# Altium PCB 32-帆板.PcbDoc
Units mm, origin at the board's own origin, x right, y up, seen from the top; angles counter-clockwise.
Board outline 257.05 x 185.8 mm, 2 copper layers (Top Layer, Bottom Layer); 51 components, 60 nets, 358 pads, 138 vias.
Unrouted connection lines stored in the file: 8.
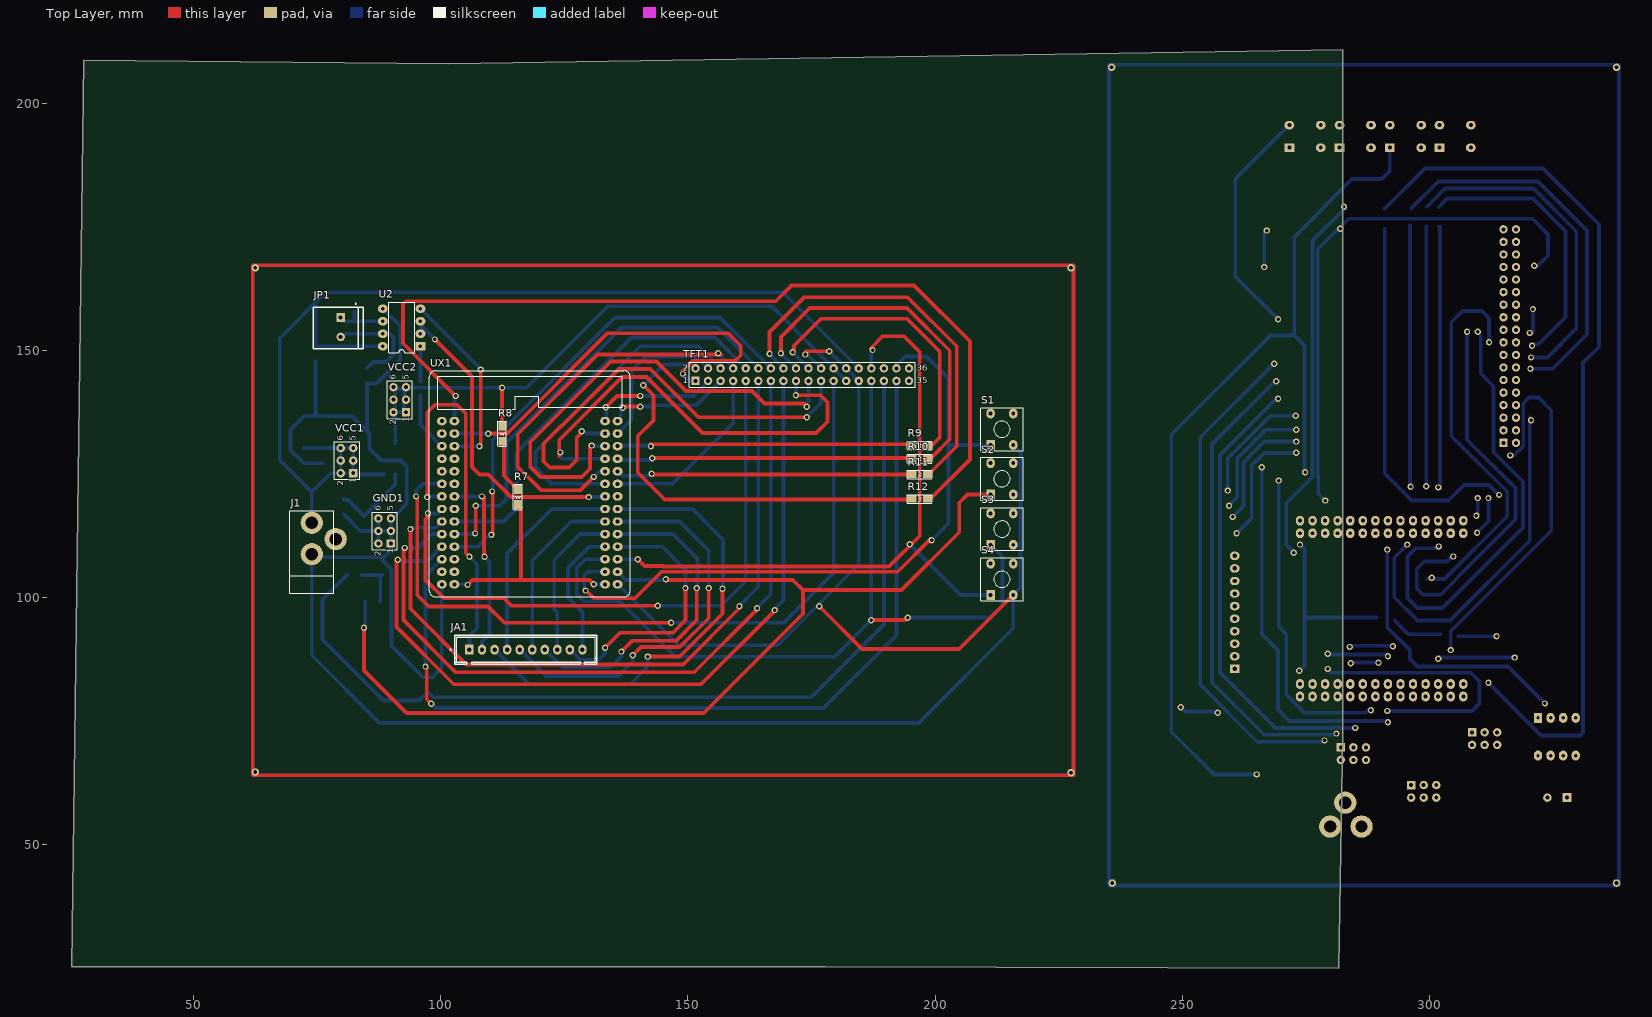
[diagram p0: Top Layer view]
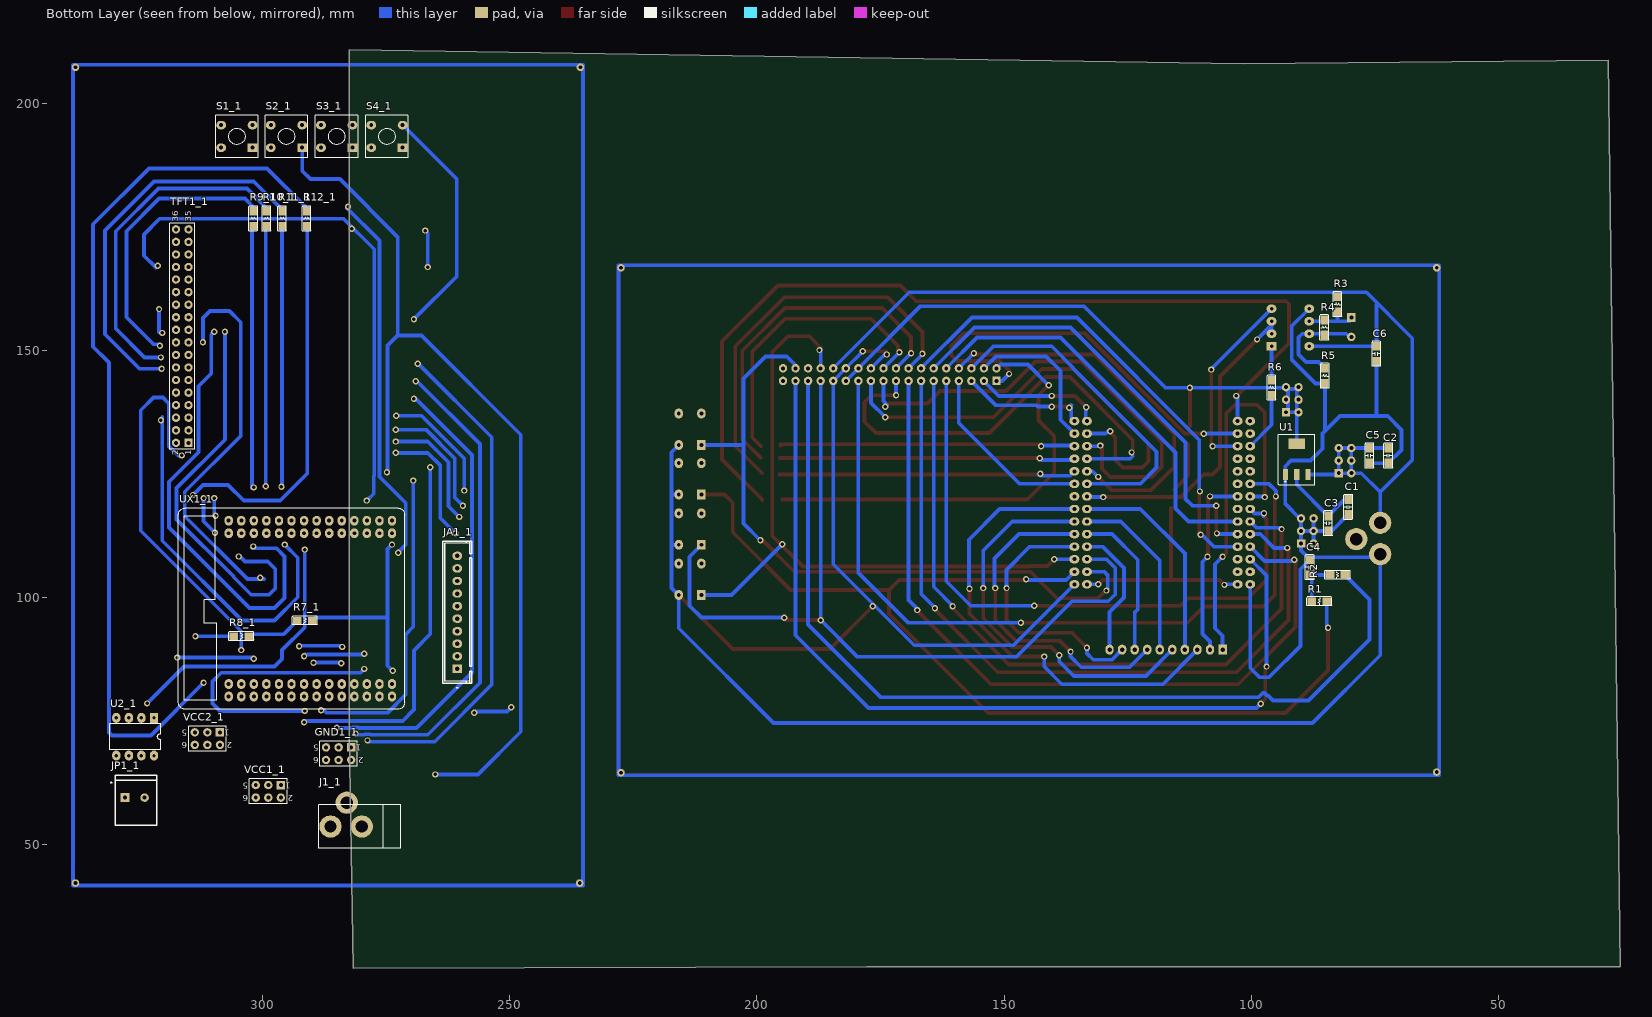
[diagram p1: Bottom Layer view, seen from below]

## Layer stack, top to bottom
Top Layer: signal copper 0.0356
Dielectric: dielectric 0.32, FR-4, Dk 4.8
Bottom Layer: signal copper 0.0356

## Board outline
25.4,25.4 177.8,25.4 281.686,25.019 282.448,72.39 282.448,210.82 101.6,208.026 27.813,208.661

## Design rules (kind name [scope] priority, off if disabled: settings)
Clearance [All] p1: gap=0.254
PolygonConnect [All] p1: connectstyle=Relief reliefconductorwidth=0.254 reliefentries=4 polygonreliefangle="90 Angle"
RoutingVias [All] p1: holewidth=0.711 width=1.27 viastyle="Through Hole" minholewidth=0.711 minwidth=1.27 maxholewidth=0.711 maxwidth=1.27
SilkToSilkClearance [All] p1 off: silktosilkclearance=0.254
SilkscreenOverComponentPads SilkToSolderMaskClearance [IsPad] p1 off: minsilkscreentomaskgap=0.254
SolderMaskExpansion [All] p1 off: expansion=0.102
TestPointUsage FabricationTestPointUsage [All] p1: valid=0 allowmultiple=FALSE
Testpoint FabricationTestpoint [All] p1: side=3 testpointundercomponent=TRUE minsize=1.016 maxsize=2.54 preferedsize=1.524 minholesize=0 maxholesize=1.016 preferedholesize=0.813 testpointgrid=0.025 style=297 order=0-112345678
Width [All] p1: maxlimit=2.032 minlimit=0.25 preferedwidth=1.27
22 further rules are at their usual default settings.

## Classes and differential pairs
component class 帆摆: C1 C2 C3 C4 C5 GND1 J1 JA1 JP1 R1 R2 R3 R4 R5 S1 S2 S3 S4 TFT1 U2 UX1 VCC1 VCC2

## Components (designator, comment, footprint, x,y, rotation, side; value= is the part's Value field where it differs from the comment)
C1 "CAP" CC1005-0402 80.433,116.798 r90 bottom
C2 "CAP" CC1005-0402 72.305,127.212 r90 bottom
C3 "CAP" CC1005-0402 84.497,116.544 r270 bottom
C4 "CAP" CC1005-0402 88.18,104.606 r90 bottom
C5 "CAP" CC1005-0402 76.115,127.212 r90 bottom
C6 "CAP" CC1005-0402 74.718,147.786 r90 bottom
GND1 "Header 2X3" HDR2-3 89.958,110.956 r90 top
GND1_1 "Header 2X3" HDR2-3 282.067,69.723 r0 bottom (schematic designator GND1)
J1 "Powerjack_F" PWJ-2/3 73.956,115.147 r90 top
J1_1 "Powerjack_F" PWJ-2/3 286.258,53.721 r0 bottom (schematic designator J1)
JA1 "HEAD10" HEAD10M 105.833,89.493 r90 top
JA1_1 "HEAD10" HEAD10M 260.604,85.598 r0 bottom (schematic designator JA1)
JP1 "H-2" H-2/2-T 79.798,156.676 r0 top
JP1_1 "H-2" H-2/2-T 327.787,59.563 r90 bottom (schematic designator JP1)
R1 "Res" R2012-0805 84.751,99.272 r0 bottom
R2 "Res" R2012-0805 84.116,104.606 r180 bottom
R3 "Res" R2012-0805 82.592,157.819 r90 bottom
R4 "Res" R2012-0805 85.259,153.12 r90 bottom
R5 "Res" R2012-0805 85.132,143.341 r90 bottom
R6 "Res" R2012-0805 95.927,140.928 r90 bottom (schematic designator R5)
R7 "Res" R2012-0805 115.612,121.878 r270 top (schematic designator R3)
R7_1 "Res" R2012-0805 292.989,95.377 r180 bottom (schematic designator R3)
R8 "Res" R2012-0805 112.437,134.705 r270 top (schematic designator R3)
R8_1 "Res" R2012-0805 305.816,92.202 r180 bottom (schematic designator R3)
R9 "Res" R2012-0805 195.368,130.768 r0 top (schematic designator R3)
R9_1 "Res" R2012-0805 301.879,175.133 r90 bottom (schematic designator R3)
R10 "Res" R2012-0805 195.368,128.101 r0 top (schematic designator R3)
R10_1 "Res" R2012-0805 299.212,175.133 r90 bottom (schematic designator R3)
R11 "Res" R2012-0805 195.368,124.926 r0 top (schematic designator R3)
R11_1 "Res" R2012-0805 296.037,175.133 r90 bottom (schematic designator R3)
R12 "Res" R2012-0805 195.368,119.973 r0 top (schematic designator R3)
R12_1 "Res" R2012-0805 291.084,175.133 r90 bottom (schematic designator R3)
S1 "SW-PB" SW-PB-4S 213.529,134.07 r90 top
S1_1 "SW-PB" SW-PB-4S 305.181,193.294 r0 bottom (schematic designator S1)
S2 "SW-PB" SW-PB-4S 213.529,124.037 r90 top
S2_1 "SW-PB" SW-PB-4S 295.148,193.294 r0 bottom (schematic designator S2)
S3 "SW-PB" SW-PB-4S 213.529,113.877 r90 top
S3_1 "SW-PB" SW-PB-4S 284.988,193.294 r0 bottom (schematic designator S3)
S4 "SW-PB" SW-PB-4S 213.529,103.717 r90 top
S4_1 "SW-PB" SW-PB-4S 274.828,193.294 r0 bottom (schematic designator S4)
TFT1 "Header 2X18" HDR2-18 151.553,143.849 r0 top
TFT1_1 "Header 2X18" HDR2-18 314.96,131.318 r90 bottom (schematic designator TFT1)
U1 "LM1117" DSO-G3/P2.3 93.133,124.926 r180 bottom
U2 "MAX485CPA" DIP8 92.117,154.644 r90 top
U2_1 "MAX485CPA" DIP8 325.755,71.882 r0 bottom (schematic designator U2)
UX1 "STM32MINI" STM32---MIN---64 100.245,135.721 r0 top
UX1_1 "STM32MINI" STM32---MIN---64 306.832,80.01 r90 bottom (schematic designator UX1)
VCC1 "Header 2X3" HDR2-3 82.338,125.18 r90 top
VCC1_1 "Header 2X3" HDR2-3 296.291,62.103 r0 bottom (schematic designator VCC1)
VCC2 "Header 2X3" HDR2-3 93.006,137.499 r90 top
VCC2_1 "Header 2X3" HDR2-3 308.61,72.771 r0 bottom (schematic designator VCC2)

## Footprints (in the part's own frame and the unit in brackets; to place one, negate y for a bottom-side part, rotate by r counter-clockwise, add the part's x,y. Pads: shape width x height; smd on the part's side, far side on the other; paste and mask are expansions set on the pad)
CC1005-0402 [mil]
  rect 70x60 smd: 1(0,0) 2(120,0)
  silkscreen extent -40,-35 160,35
DIP8 [mm]
  rect 1.7x2 hole 0.7: 1(-3.81,-3.81)
  oval 1.7x2 hole 0.7: 2(-1.27,-3.81) 3(1.27,-3.81) 4(3.81,-3.81) 5(3.81,3.81) 6(1.27,3.81) 7(-1.27,3.81) 8(-3.81,3.81)
  silkscreen extent -5.15,-2.65 5.15,2.65
DSO-G3/P2.3 [mil]
  rect 41.34x85 smd: 1(181.1,0) 2(0,0) 3(90.55,0)
  rect 133.86x85 smd: 3(90,245)
  silkscreen extent -55,-85 235,315
H-2/2-T [mm]
  rect 1.8x1.8 hole 0.8: 1(0,0)
  round 1.7 hole 0.8: 2(0,-3.937)
  silkscreen extent -5.59,-6.35 4.57,2.92
HDR2-3 [mm]
  rect 1.7x1.7 hole 0.8: 1(0,0)
  round 1.7 hole 0.8: 2(0,2.54) 3(2.54,0) 4(2.54,2.54) 5(5.08,0) 6(5.08,2.54)
  silkscreen extent -1.27,-1.27 6.35,3.81
HDR2-18 [mm]
  rect 1.7x1.7 hole 0.8: 1(0,0)
  round 1.7 hole 0.8: 2(0,2.54) 3(2.54,0) 4(2.54,2.54) 5(5.08,0) 6(5.08,2.54) 7(7.62,0) 8(7.62,2.54) 9(10.16,0) 10(10.16,2.54) 11(12.7,0) 12(12.7,2.54) 13(15.24,0) 14(15.24,2.54) 15(17.78,0) 16(17.78,2.54) 17(20.32,0) 18(20.32,2.54) 19(22.86,0) 20(22.86,2.54) 21(25.4,0) 22(25.4,2.54) 23(27.94,0) 24(27.94,2.54) 25(30.48,0) 26(30.48,2.54) 27(33.02,0) 28(33.02,2.54) 29(35.56,0) 30(35.56,2.54) 31(38.1,0) 32(38.1,2.54) 33(40.64,0) 34(40.64,2.54) 35(43.18,0) 36(43.18,2.54)
  silkscreen extent -1.27,-1.27 44.45,3.81
HEAD10M [mm]
  rect 2x1.7 hole 0.9: 1(0,0)
  oval 2x1.7 hole 0.9: 2(0,-2.54) 3(0,-5.08) 4(0,-7.62) 5(0,-10.16) 6(0,-12.7) 7(0,-15.24) 8(0,-17.78) 9(0,-20.32) 10(0,-22.86)
  silkscreen extent -2.92,-25.78 2.92,3.93
PWJ-2/3 [mm]
  round 4.5 hole 2.5: 1(-6.35,0) 2(0,0) 3(-3.302,-4.826)
  silkscreen extent -14.22,-4.45 2.41,4.44
R2012-0805 [mil]
  rect 70x60 smd: 1(0,0) 2(120,0)
  silkscreen extent -40,-35 160,35
STM32---MIN---64 [mm]
  oval 2x1.7 hole 0.8: 1(0,0) 2(0,-2.54) 3(0,-5.08) 4(0,-7.62) 5(0,-10.16) 6(0,-12.7) 7(0,-15.24) 8(0,-17.78) 9(0,-20.32) 10(0,-22.86) 11(0,-25.4) 12(0,-27.94) 13(0,-30.48) 14(0,-33.02) 15(2.54,0) 16(2.54,-2.54) 17(2.54,-5.08) 18(2.54,-7.62) 19(2.54,-10.16) 20(2.54,-12.7) 21(2.54,-15.24) 22(2.54,-17.78) 23(2.54,-20.32) 24(2.54,-22.86) 25(2.54,-25.4) 26(2.54,-27.94) 27(2.54,-30.48) 28(2.54,-33.02) 29(33.02,0) 30(33.02,-2.54) 31(33.02,-5.08) 32(33.02,-7.62) 33(33.02,-10.16) 34(33.02,-12.7) 35(33.02,-15.24) 36(33.02,-17.78) 37(33.02,-20.32) 38(33.02,-22.86) 39(33.02,-25.4) 40(33.02,-27.94) 41(33.02,-30.48) 42(33.02,-33.02) 43(35.56,0) 44(35.56,-2.54) 45(35.56,-5.08) 46(35.56,-7.62) 47(35.56,-10.16) 48(35.56,-12.7) 49(35.56,-15.24) 50(35.56,-17.78) 51(35.56,-20.32) 52(35.56,-22.86) 53(35.56,-25.4) 54(35.56,-27.94) 55(35.56,-30.48) 56(35.56,-33.02)
  silkscreen extent -2.54,-35.56 38.1,10.16
SW-PB-4S [mm]
  rect 2x1.7 hole 0.8: 1(-3.175,2.286)
  oval 2x1.7 hole 0.8: 2(-3.175,-2.286) 3(3.175,-2.286) 4(3.175,2.286)
  silkscreen extent -4.32,-4.32 4.32,4.32

## Part data
C1 C2 C3 C4 C5 C6: "Capacitor"
GND1 GND1_1 VCC1 VCC1_1 VCC2 VCC2_1: "Header, 3-Pin, Dual row"
J1 J1_1: "2-Conductor Jack with 1 break contact"
JA1 JA1_1: "Connector,10-pin"
JP1 JP1_1: "Header, 2-Pin"
R1 R2 R3 R4 R5 R6 R7 R7_1 R8 R8_1 R9 R9_1 R10 R10_1 R11 R11_1 R12 R12_1: "Resistor"
S1 S1_1 S2 S2_1 S3 S3_1 S4 S4_1: "Switch"
TFT1 TFT1_1: "Header, 18Pin, Dual row"
U2 U2_1: library part NRF24L01
UX1 UX1_1: library part STM32---MIN--64

## Free pads (board coordinates)
  round 1.524 hole 0.762: 0(227.499,64.601) 0(235.712,207.264) 1(227.499,166.709) 1(337.82,207.264) 2(62.526,166.709) 2(337.82,42.291) 3(62.526,64.728) 3(235.839,42.291)

## Via types
v1: diameter 1.27, hole 0.711, Top Layer to Bottom Layer, 138 vias

## Nets (pads, with @x,y where several pads share a name; then routed paths per layer and width w, separated by ;. In a path a pad name is that pad's centre, name@x,y a point inside that pad or via, vN(x,y) a via of type N, cw(c..) or ccw(c..) an arc to the next point about the centre after c; other vN are vias at no path point)
A: JP1.1 R3.1 R4.2 U2.6 | length 10.3
  Bottom Layer w0.762: JP1.1@79.798,156.295 80.179,155.914 U2.6 ; 82.592,156.168 R3.1
A0: JA1.10 UX1.39 | length 27
  Bottom Layer w0.762: JA1.10 128.693,97.113 125.772,100.034 125.772,106.003 130.09,110.321 UX1.39
A1: JA1.9 UX1.53 | length 53.8
  Top Layer w0.762: v1(133.265,89.874) 136.313,92.922 146.981,92.922 149.521,95.462 v1(149.521,101.939)
  Bottom Layer w0.762: JA1.9 128.185,87.461 131.995,87.461 133.265,88.731 v1(133.265,89.874) ; UX1.53 144.822,110.321 149.521,105.622 v1@149.521,102.193
A2: JA1.8 UX1.38 | length 30.9
  Bottom Layer w0.762: JA1.8 123.613,96.986 122.978,97.621 122.978,107.654 128.185,112.861 UX1.38
A3: JA1.7 UX1.52 | length 67.1
  Top Layer w0.762: v1(136.567,89.112) 138.726,91.271 147.616,91.271 151.807,95.462 v1(151.807,101.939)
  Bottom Layer w0.762: JA1.7 124.629,85.937 134.408,85.937 136.567,88.096 v1(136.567,89.112) ; UX1.52 146.981,112.861 151.934,107.908 v1@151.934,102.193
A4: JA1.6 UX1.37 | length 36.7
  Bottom Layer w0.762: JA1.6 118.533,107.527 126.407,115.401 UX1.37 UX1.37@132.63,115.401
A5: JA1.5 UX1.51 | length 80.3
  Top Layer w0.762: v1(138.853,88.35) 140.504,90.001 148.378,90.001 154.22,95.843 v1(154.22,101.939)
  Bottom Layer w0.762: JA1.5 121.327,84.159 135.932,84.159 138.853,87.08 v1@138.853,88.096 ; UX1.51 148.378,115.401 154.22,109.559 v1(154.22,101.939)
A6: JA1.4 UX1.36 | length 43
  Bottom Layer w0.762: JA1.4 113.453,108.924 122.47,117.941 UX1.36
A7: JA1.3 UX1.50 | length 94.7
  Top Layer w0.762: v1(141.901,88.096) 148.378,88.096 157.014,96.732 v1(157.014,101.812)
  Bottom Layer w0.762: JA1.3 117.898,82.508 138.345,82.508 141.901,86.064 v1(141.901,88.096) ; UX1.50 150.918,117.941 157.141,111.718 v1@157.141,102.066
A8: UX1.2
A9: U2.4 UX1.17 | length 37.7
  Top Layer w0.762: v1@108.119,130.895 v1(108.119,146.135)
  Bottom Layer w0.762: U2.4 108.119,146.262 v1(108.119,146.135) ; UX1.17 v1(107.865,130.641)
A10: R6.1 R6.2 U2.1 UX1.3 | length 19.1
  Bottom Layer w0.762: R6.1 95.927,134.959 UX1.3 ; R6.2@95.927,143.849 U2.1
A11: UX1.18
A12: UX1.4
A13: UX1.19
A14: UX1.5
A15: UX1.20
B: JP1.2 R4.1 R5.2 U2.7 | length 21.3
  Bottom Layer w0.762: JP1.2@79.798,152.358 80.814,153.374 U2.7 89.704,153.374 90.466,152.612 90.466,149.183 88.942,147.659 86.402,147.659 R5.2
B0: TFT1.6 UX1.34 | length 66.9
  Bottom Layer w0.762: UX1.34 122.47,123.021 119.168,126.323 119.168,129.498 136.186,146.516 136.122,146.58 140.377,150.834 152.188,150.834 TFT1.6
B1: TFT1.7 UX1.48 | length 37
  Bottom Layer w0.762: UX1.48 146.854,123.021 159.173,135.34 TFT1.7
B2: TFT1.8 UX1.33 | length 80.6
  Top Layer w0.762: v1(130.979,124.418) 128.312,121.751 120.311,121.751 115.612,126.45 115.612,133.054 131.741,149.183 156.76,149.183 v1(156.125,149.437)
  Bottom Layer w0.762: v1(130.979,124.418) 132.122,125.561 UX1.33 ; v1(156.125,149.437) TFT1.8
B3: TFT1.9 UX1.8 | length 126.4
  Top Layer w0.762: v1@97.578,116.544 96.943,115.909 96.943,103.59 100.626,99.907 112.818,99.907 114.342,98.383 v1(143.933,98.383)
  Bottom Layer w0.762: v1@97.578,116.544 v1(97.451,117.052) 99.356,117.052 UX1.8 ; v1(143.933,98.383) 156.76,98.383 161.713,103.336 TFT1.9
B4: TFT1.10 UX1.23 | length 83.5
  Bottom Layer w0.762: UX1.23 112.691,115.401 115.358,118.068 115.358,129.371 138.599,152.612 155.49,152.612 TFT1.10
B5: TFT1.11 UX1.9 | length 147
  Top Layer w0.762: v1@94.276,113.877 93.895,113.496 93.895,110.72 94.022,110.593 94.022,109.541 93.895,109.414 93.895,97.748 105.134,86.509 149.076,86.509 160.316,97.748 v1@160.189,98.129
  Bottom Layer w0.762: v1@94.276,113.877 94.022,114.131 98.975,114.131 UX1.9 ; v1@160.189,98.129 164.253,102.193 TFT1.11
  other v1: 160.443,98.256 93.895,113.877
B6: TFT1.12 UX1.24 | length 91.2
  Top Layer w0.762: v1@107.103,113.242 v1(107.103,118.576)
  Bottom Layer w0.762: UX1.24 v1@106.404,112.861 ; v1(107.103,118.576) 111.929,118.576 113.326,119.973 113.326,131.403 136.567,154.644 155.998,154.644 TFT1.12
  other v1: 106.976,112.988
B7: TFT1.13 UX1.10 | length 151.7
  Top Layer w0.762: v1(92.752,110.067) 92.498,109.813 92.498,108.307 92.625,108.18 92.625,107.128 92.498,107.001 92.498,95.462 103.039,84.921 151.299,84.921 v1@163.999,97.621
  Bottom Layer w0.762: v1(92.752,110.067) 95.419,110.067 98.213,112.861 UX1.10 ; v1@163.935,97.939 166.793,100.796 TFT1.13
  other v1: 163.999,97.875
B8: TFT1.14 UX1.25 | length 98.1
  Top Layer w0.762: v1@110.532,112.861 v1@110.532,121.243
  Bottom Layer w0.762: UX1.25 107.611,110.321 110.151,112.861 v1@110.532,112.861 ; v1@110.532,121.751 110.532,131.911 135.297,156.676 156.506,156.676 TFT1.14
  other v1: 110.278,112.734 110.405,121.497
B9: TFT1.15 UX1.11 | length 159
  Top Layer w0.762: v1(91.355,107.654) 91.101,107.4 91.101,94.065 102.658,82.508 152.696,82.508 167.301,97.113 v1@167.301,97.494
  Bottom Layer w0.762: v1(91.355,107.654) 91.101,107.4 97.324,107.4 UX1.11 ; v1@167.301,97.494 169.333,99.526 TFT1.15
  other v1: 167.555,97.494
B10: R11.1 R11.2 TFT1.16 UX1.47 | length 141.4
  Top Layer w0.762: v1@143.044,124.926 R11.1@195.495,124.926 ; v1@166.666,149.056 v1(166.539,149.31) 166.539,153.755 173.524,160.74 194.479,160.74 204.385,150.834 204.385,130.641 R11.2@198.924,125.18
  Bottom Layer w0.762: UX1.47 136.694,124.672 142.663,124.672 v1@143.044,124.926 ; v1@166.666,149.056 TFT1.16
  other v1: 142.663,125.053
B11: TFT1.17 UX1.32 | length 91.7
  Top Layer w0.762: 123.994,128.609 123.994,131.911 136.694,144.611 141.647,144.611 152.95,133.308 164.362,133.308 175.937,133.308 178.223,135.594 178.223,139.531 176.826,140.928 v1(171.873,140.928)
  Bottom Layer w0.762: 123.994,128.609 124.502,128.101 UX1.32 ; v1(171.873,140.928) TFT1.17
  other v1: 124.248,129.371
B12: R10.1 R10.2 TFT1.18 UX1.46 | length 130.4
  Top Layer w0.762: v1(142.79,128.228) R10.1@195.368,128.228 ; v1(168.825,149.437) 168.825,152.739 174.667,158.581 194.352,158.581 202.988,149.945 202.988,132.038 199.305,128.355
  Bottom Layer w0.762: UX1.46@136.059,127.847 142.409,127.847 v1(142.79,128.228) ; v1(168.825,149.437) TFT1.18
B13: TFT1.19 UX1.31 | length 97.8
  Top Layer w0.762: v1@130.217,130.895 130.217,126.069 128.566,124.418 120.184,124.418 118.152,126.45 118.152,131.53 134.408,147.786 143.679,147.786 149.648,141.817 162.983,141.817 165.523,139.277 173.27,139.277 173.651,139.15 v1@173.651,139.023
  Bottom Layer w0.762: v1@130.217,130.895 130.471,131.022 130.852,130.641 UX1.31 ; v1@173.651,139.023 174.413,139.785 TFT1.19
  other v1: 130.598,130.768 174.032,138.642
B14: R9.1 R9.2 TFT1.20 UX1.45 | length 120.2
  Top Layer w0.762: v1@142.409,131.022 R9.1@194.987,131.022 ; v1(171.174,149.628) 171.492,149.818 171.492,150.961 176.953,156.422 194.352,156.422 200.956,149.818 200.956,132.419 R9.2@199.178,130.641 ; R9.1@195.241,130.768 R9.1@195.241,131.022
  Bottom Layer w0.762: UX1.45@135.932,130.768 142.536,130.768 v1@142.409,131.022 ; v1(171.174,149.628) TFT1.20
  other v1: 142.536,130.641
B15: TFT1.21 UX1.30 | length 95
  Top Layer w0.762: v1@128.693,133.562 127.55,132.419 127.55,127.847 126.026,126.323 122.089,126.323 120.819,127.593 120.819,131.149 124.375,134.705 124.502,134.705 136.059,146.262 142.409,146.262 152.188,136.483 v1(174.032,136.483)
  Bottom Layer w0.762: v1@128.693,133.562 128.693,133.943 129.455,133.181 UX1.30 ; v1(174.032,136.483) 176.953,139.404 TFT1.21
  other v1: 128.566,133.689
BAT: UX1.26
BL: TFT1.23 UX1.6 | length 156.3
  Top Layer w0.762: v1@95.292,120.1 95.292,100.542 97.59,98.244 109.577,98.244 112.867,94.954 v1(146.6,94.954)
  Bottom Layer w0.762: v1@95.038,120.227 95.038,121.624 96.435,123.021 UX1.6 ; v1(146.6,94.954) 169.46,94.954 179.493,104.987 TFT1.23
  other v1: 95.038,120.481
BT: UX1.1
C0: S1.1 TFT1.34 UX1.41 | length 138.5
  Top Layer w0.762: v1@129.582,101.304 130.979,99.907 139.361,99.907 144.695,105.241 192.447,105.241 v1@199.051,111.845
  Bottom Layer w0.762: v1@129.074,101.812 129.074,104.606 129.709,105.241 UX1.41 ; TFT1.34 192.193,147.024 193.971,148.802 198.289,148.802 202.734,144.357 202.734,130.895 ; v1@199.435,111.721 202.734,115.02 202.734,130.895 ; S1.1 202.734,130.895
  other v1: 129.328,101.431 199.305,111.591
C1: R1.1 S2.1 UX1.55 | length 208.3
  Top Layer w0.762: v1(84.497,93.938) 84.497,85.302 93.133,76.666 153.204,76.666 173.27,96.732 173.27,101.558 ; v1@145.33,103.59 171.238,103.59 173.27,101.558 ; S2.1 206.544,120.862 204.893,119.211 204.893,113.242 193.209,101.558 173.27,101.558
  Bottom Layer w0.762: v1@84.751,93.684 R1.1 ; UX1.55 137.456,103.59 v1@145.457,103.59
  other v1: 145.584,103.717
C2: S3.1 TFT1.29 UX1.40 | length 168.6
  Top Layer w0.762: v1(187.113,95.462) 193.971,95.462 v1(194.479,95.97)
  Bottom Layer w0.762: 127.55,100.669 127.55,106.003 129.328,107.781 UX1.40 ; 127.931,100.288 128.947,99.272 136.313,99.272 147.552,88.033 179.683,88.033 v1(187.113,95.462) TFT1.29 ; v1(194.479,95.97) 211.243,95.97 213.656,98.383 213.656,108.289 S3.1
C3: S4.1 TFT1.30 UX1.54 | length 138.5
  Top Layer w0.762: v1(139.869,107.781) 141.266,106.384 144.868,106.384 144.956,106.296 190.708,106.296 196.892,112.48 196.892,149.691 193.717,152.866 189.399,152.866 186.986,150.453 v1@187.113,150.326
  Bottom Layer w0.762: UX1.54 v1(139.869,107.781) ; TFT1.30 v1@187.113,150.326 ; v1(194.86,110.829) 205.147,100.542 S4.1
  other v1: 187.367,150.072
C4: U2.2 U2.3 UX1.35 | length 64.7
  Top Layer w0.762: v1(98.848,152.231) 106.341,144.738 106.341,126.45 107.865,124.926 109.643,124.926 114.215,120.354 v1(129.963,120.354)
  Bottom Layer w0.762: U2.2 95.927,154.644 ; U2.3 95.927,154.644 ; v1(98.848,152.231) 96.435,154.644 95.927,154.644 ; v1(129.963,120.354) UX1.35@133.138,120.354
C5: UX1.49
C6: TFT1.4 UX1.44 | length 31.6
  Bottom Layer w0.762: UX1.44 138.599,135.975 138.599,145.881 141.52,148.802 151.68,148.802 TFT1.4
C7: TFT1.3 UX1.29 | length 25.3
  Top Layer w0.762: v1@133.646,138.769 135.678,140.801 v1(140.377,140.801)
  Bottom Layer w0.762: UX1.29 133.519,135.975 133.519,138.515 v1@133.646,138.769 ; v1@140.885,140.801 151.103,140.801 154.093,143.791 TFT1.3
  other v1: 133.392,138.515
C8: R12.1 R12.2 TFT1.2 UX1.15 | length 274
  Top Layer w0.762: v1(103.039,140.801) 92.371,151.469 92.371,159.343 92.967,159.939 167.77,159.939 170.984,163.153 195.749,163.153 207.052,151.85 207.052,127.974 198.924,119.846 R12.2@198.924,119.719 ; v1(141.012,142.96) 143.044,140.928 143.044,135.848 139.869,132.673 139.869,125.307 145.33,119.846 R12.1@194.86,119.846
  Bottom Layer w0.762: UX1.15 v1@102.785,140.674 ; v1(141.012,142.96) 145.203,147.151 150.791,147.151 TFT1.2
C9: TFT1.1 UX1.16 | length 85.5
  Top Layer w0.762: v1(109.643,133.181) 113.462,133.181 133.782,153.501 158.157,153.501 160.716,150.942 160.716,149.037 159.554,147.874 150.938,147.874 148.945,145.881
  Bottom Layer w0.762: UX1.16 v1(109.643,133.181) ; v1(149.011,145.248) 150.41,143.849 TFT1.1
C11: JA1.2 UX1.21 | length 37.8
  Top Layer w0.762: v1@108.754,108.035 v1@108.754,120.354
  Bottom Layer w0.762: UX1.21 v1(108.373,120.481) ; JA1.2 108.373,91.144 109.897,92.668 109.897,107.273 v1(108.881,108.289)
C12: JA1.1 UX1.7 | length 78.4
  Top Layer w0.762: v1(97.324,120.354) 97.324,137.499 98.848,139.023 103.293,139.023 105.071,137.245 105.071,109.051 v1(105.833,108.289)
  Bottom Layer w0.762: v1@97.451,120.481 UX1.7 ; JA1.1 105.833,92.287 107.357,93.811 107.357,106.765 v1(105.833,108.289)
C13: TFT1.33 UX1.12 | length 182.6
  Top Layer w0.762: v1@97.197,85.81 97.197,79.46 v1(98.086,78.571)
  Bottom Layer w0.762: v1@96.943,86.191 96.943,104.479 UX1.12 ; v1(98.086,78.571) 98.975,77.682 177.461,77.682 192.193,92.414 TFT1.33
  other v1: 96.943,86.064
C14: UX1.27
C15: UX1.13
D2: UX1.22
GND: C1.1 C2.1 C3.2 C4.2 C5.1 C6.1 GND1.1 GND1.2 GND1.3 GND1.4 GND1.5 GND1.6 J1.1 R5.1 S1.2 S2.2 S3.2 S4.2 TFT1.22 TFT1.26 TFT1.27 U1.2 U2.5 UX1.14 UX1.56 | length 563.3
  Top Layer w0.762: v1@173.905,149.437 173.905,149.818 v1(178.604,149.818) ; v1(176.572,98.256) 185.208,89.62 204.893,89.62 S4.2
  Bottom Layer w0.762: C6.1 74.718,136.864 74.591,136.737 ; C5.1 C2.1 69.638,129.879 69.638,133.943 72.432,136.737 74.591,136.737 ; C1.1 83.735,113.496 C3.2 GND1.4 ; GND1.2 GND1.4 ; GND1.6 GND1.4 ; C4.2 90.085,105.749 90.085,90.255 96.435,83.905 98.34,83.905 100.245,85.81 100.245,97.748 UX1.14 ; U2.5 91.863,154.898 91.863,148.167 87.037,143.341 R5.1 85.132,133.689 ; UX1.56 148.124,90.382 168.19,90.382 184.573,106.765 TFT1.27 TFT1.26 v1(178.604,149.818) ; v1@173.905,149.437 TFT1.22 ; S4.2 215.815,93.811 196.638,74.634 87.672,74.634 73.956,88.35 J1.1 74.591,108.162 88.561,108.162 89.958,109.559 GND1.1 GND1.3 ; S3.2 217.3,110.702 ; S2.2 217.046,120.862 ; S1.2 217.3,129.41 217.3,110.702 ; S4.2@215.864,100.542 217.3,101.978 217.3,110.702 ; 74.591,136.737 82.084,136.737 85.132,133.689 ; 85.132,133.689 85.64,133.181 85.64,130.133 88.053,127.72 91.99,127.72 93.133,126.577 U1.2 93.133,118.957 90.212,116.036 GND1.5 GND1.3 ; GND1.4 GND1.3
  other v1: 173.778,149.183
NetC4_1: C4.1 R1.2 R2.1 | length 9
  Bottom Layer w0.762: R2.1 C4.1 ; R1.2 C4.1@87.799,104.225
NetR2_2: R2.2 TFT1.31 | length 190.2
  Bottom Layer w0.762: R2.2 76.115,99.653 76.115,91.525 88.434,79.206 95.655,79.206 96.671,80.222 96.816,80.222 97.324,80.73 97.723,80.73 98.612,79.841 174.921,79.841 189.653,94.573 TFT1.31
RST: TFT1.5 UX1.43 | length 26.1
  Top Layer w0.762: v1(136.821,138.388) 137.075,138.642 v1(140.377,138.642)
  Bottom Layer w0.762: UX1.43 136.44,136.356 136.44,139.023 136.313,138.896 ; v1@140.123,138.642 v1(140.377,138.642) 143.171,138.642 143.425,138.896 151.68,138.896 TFT1.5
VCC: C2.2 C5.2 C6.2 J1.2 R3.2 TFT1.28 U1.1 U2.8 VCC1.1 VCC1.2 VCC1.3 VCC1.4 VCC1.5 VCC1.6 | length 225
  Bottom Layer w0.762: C2.2 C5.2 VCC1.6 VCC1.4 VCC1.2 ; J1.2 73.956,121.37 ; 74.718,159.195 C6.2 U2.8 ; VCC1.6@80.179,130.26 VCC1.5 VCC1.3 VCC1.1 VCC1.2 ; VCC1.1@82.592,124.926 U1.1 ; TFT1.28 169.206,161.756 76.75,161.756 67.479,152.485 67.479,127.847 73.956,121.37 ; 73.956,121.37 77.766,125.18 VCC1.2
VCC3.3: C1.2 C3.1 R7.1 R7.2 R8.1 R8.2 TFT1.24 TFT1.25 U1.3 UX1.28 UX1.42 VCC2.1 VCC2.2 VCC2.3 VCC2.4 VCC2.5 VCC2.6 | length 202.2
  Top Layer w0.762: v1(105.452,102.574) 106.468,103.59 116.247,103.59 ; R8.1 v1(112.437,142.452) ; R8.2@112.818,131.149 112.818,124.672 R7.1 ; R7.2@116.247,118.195 116.247,103.59 ; v1(130.979,102.701) 130.09,103.59 116.247,103.59
  Bottom Layer w0.762: C1.2 81.195,119.846 C3.1 90.833,122.88 U1.3@90.833,124.926 ; VCC2.2 VCC2.2@90.847,137.499 ; U1.3@90.847,131.149 VCC2.2@90.847,137.499 ; VCC2.1@92.625,137.88 92.625,140.039 92.625,142.198 90.847,142.198 90.847,140.039 VCC2.2@90.847,137.499 ; VCC2.1 VCC2.2@90.847,137.499 ; VCC2.5 93.133,142.452 v1(112.437,142.452) 117.39,142.452 133.9,158.962 166.92,158.962 TFT1.24 TFT1.25 ; UX1.28 v1@105.325,102.701 ; v1(130.979,102.701) UX1.42
VCC5: 
pads on no net: GND1_1.1 GND1_1.2 GND1_1.3 GND1_1.4 GND1_1.5 GND1_1.6 J1.3 J1_1.1 J1_1.2 J1_1.3 JA1_1.1 JA1_1.2 JA1_1.3 JA1_1.4 JA1_1.5 JA1_1.6 JA1_1.7 JA1_1.8 JA1_1.9 JA1_1.10 JP1_1.1 JP1_1.2 R7_1.1 R7_1.2 R8_1.1 R8_1.2 R9_1.1 R9_1.2 R10_1.1 R10_1.2 R11_1.1 R11_1.2 R12_1.1 R12_1.2 S1.3 S1.4 S1_1.1 S1_1.2 S1_1.3 S1_1.4 S2.3 S2.4 S2_1.1 S2_1.2 S2_1.3 S2_1.4 S3.3 S3.4 S3_1.1 S3_1.2 S3_1.3 S3_1.4 S4.3 S4.4 S4_1.1 S4_1.2 S4_1.3 S4_1.4 TFT1.32 TFT1.35 TFT1.36 TFT1_1.1 TFT1_1.2 TFT1_1.3 TFT1_1.4 TFT1_1.5 TFT1_1.6 TFT1_1.7 TFT1_1.8 TFT1_1.9 TFT1_1.10 TFT1_1.11 TFT1_1.12 TFT1_1.13 TFT1_1.14 TFT1_1.15 TFT1_1.16 TFT1_1.17 TFT1_1.18 TFT1_1.19 TFT1_1.20 TFT1_1.21 TFT1_1.22 TFT1_1.23 TFT1_1.24 TFT1_1.25 TFT1_1.26 TFT1_1.27 TFT1_1.28 TFT1_1.29 TFT1_1.30 TFT1_1.31 TFT1_1.32 TFT1_1.33 TFT1_1.34 TFT1_1.35 TFT1_1.36 U2_1.1 U2_1.2 U2_1.3 U2_1.4 U2_1.5 U2_1.6 U2_1.7 U2_1.8 UX1_1.1 UX1_1.2 UX1_1.3 UX1_1.4 UX1_1.5 UX1_1.6 UX1_1.7 UX1_1.8 UX1_1.9 UX1_1.10 UX1_1.11 UX1_1.12 UX1_1.13 UX1_1.14 UX1_1.15 UX1_1.16 UX1_1.17 UX1_1.18 UX1_1.19 UX1_1.20 UX1_1.21 UX1_1.22 UX1_1.23 UX1_1.24 UX1_1.25 UX1_1.26 UX1_1.27 UX1_1.28 UX1_1.29 UX1_1.30 UX1_1.31 UX1_1.32 UX1_1.33 UX1_1.34 UX1_1.35 UX1_1.36 UX1_1.37 UX1_1.38 UX1_1.39 UX1_1.40 UX1_1.41 UX1_1.42 UX1_1.43 UX1_1.44 UX1_1.45 UX1_1.46 UX1_1.47 UX1_1.48 UX1_1.49 UX1_1.50 UX1_1.51 UX1_1.52 UX1_1.53 UX1_1.54 UX1_1.55 UX1_1.56 VCC1_1.1 VCC1_1.2 VCC1_1.3 VCC1_1.4 VCC1_1.5 VCC1_1.6 VCC2_1.1 VCC2_1.2 VCC2_1.3 VCC2_1.4 VCC2_1.5 VCC2_1.6
copper on no net: | length 3816.9
  Top Layer w0.762: 62.018,167.217 62.018,64.093 228.007,64.093 228.007,167.217 ; 62.272,167.217 227.88,167.217
  Bottom Layer w0.762: v1(249.682,77.851) 250.571,76.962 v1@256.921,76.962 ; v1(259.207,121.666) 259.207,128.143 267.843,136.779 v1(272.923,136.779) ; v1(259.461,118.618) 261.112,120.269 261.112,128.143 266.954,133.985 v1(273.05,133.985) ; v1(260.223,116.332) 262.382,118.491 262.382,127.381 266.573,131.572 v1(273.05,131.572) ; v1(260.985,113.03) 264.033,116.078 264.033,126.746 266.573,129.286 v1(273.05,129.286) ; v1(265.049,64.262) 256.413,64.262 247.777,72.898 247.777,132.969 267.843,153.035 272.669,153.035 ; v1(266.065,126.365) 266.065,92.633 269.355,89.343 269.355,77.355 271.653,75.057 v1@291.211,75.057 ; v1(266.573,166.878) 266.573,173.736 v1(267.081,174.244) ; v1@268.605,147.066 268.224,147.066 253.619,132.461 253.619,82.423 265.176,70.866 278.511,70.866 v1(278.765,71.12) ; v1@268.732,143.764 256.032,131.064 256.032,82.804 266.573,72.263 278.112,72.263 278.239,72.39 279.291,72.39 279.418,72.263 280.924,72.263 v1(281.178,72.517) ; v1@269.24,139.954 268.859,140.081 257.62,128.841 257.62,84.9 268.859,73.66 280.525,73.66 280.652,73.787 281.704,73.787 281.831,73.66 284.607,73.66 v1@284.988,74.041 ; v1(269.367,156.337) 260.731,164.973 260.731,184.658 271.653,195.58 ; v1(269.494,123.698) 269.494,94.107 271.018,92.583 271.018,80.391 274.701,76.708 287.02,76.708 v1@287.655,77.343 ; v1@272.415,109.347 271.018,110.744 271.018,119.126 276.352,124.46 276.352,172.212 v1@282.956,178.816 ; v1(273.685,85.217) 274.701,86.233 274.701,96.012 ; v1(273.812,110.744) 274.701,109.855 274.701,96.012 ; v1@274.701,125.095 274.701,151.003 272.669,153.035 ; v1(278.892,119.634) 277.495,121.031 277.495,124.633 277.407,124.721 277.407,170.473 283.591,176.657 320.802,176.657 323.977,173.482 323.977,169.164 321.564,166.751 v1@321.437,166.878 ; v1@279.146,88.519 v1@291.465,88.519 ; v1(279.4,85.598) 280.162,84.836 308.356,84.836 310.134,83.058 310.134,78.613 308.61,77.089 v1(291.465,77.089) ; v1@283.972,90.297 v1@292.354,90.297 ; v1@284.353,86.868 v1(289.687,86.868) ; 289.306,96.012 274.701,96.012 ; 290.83,178.689 290.957,178.689 299.085,186.817 322.961,186.817 334.264,175.514 334.264,150.749 331.05,147.535 331.05,72.732 330.454,72.136 322.58,72.136 v1(311.912,82.804) ; 290.957,174.625 290.957,125.095 296.418,119.634 303.784,119.634 306.959,122.809 312.039,122.809 v1(314.071,120.777) ; v1(291.465,109.728) 291.465,93.98 296.037,89.408 296.037,87.63 297.561,86.106 315.849,86.106 v1(323.342,78.613) ; 291.973,191.008 291.973,186.309 290.322,184.658 284.353,184.658 272.669,172.974 272.669,153.035 ; 292.989,95.377 295.783,92.583 302.26,92.583 ; v1(295.529,110.744) 292.862,108.077 292.862,100.076 297.561,95.377 304.165,95.377 320.294,111.506 320.294,136.525 v1(320.548,135.89) ; v1@296.037,122.809 296.037,175.26 ; 296.291,178.689 301.752,184.15 321.945,184.15 331.851,174.244 331.851,153.289 324.866,146.304 v1(320.421,146.304) v1@320.167,146.431 ; v1(299.339,122.555) 299.339,175.133 ; 299.466,179.07 303.149,182.753 321.056,182.753 329.692,174.117 329.692,154.432 323.85,148.59 v1(320.548,148.59) ; 299.72,103.759 303.022,103.759 315.722,116.459 315.722,121.412 304.419,132.715 304.419,144.127 304.419,155.702 306.705,157.988 310.642,157.988 312.039,156.591 v1(312.039,151.638) ; 301.752,178.943 303.53,180.721 320.929,180.721 327.533,174.117 327.533,156.718 322.072,151.257 320.929,151.257 v1(320.738,150.939) ; 301.879,175.006 302.133,175.006 ; v1@302.006,87.884 v1(317.246,87.884) ; v1@302.006,109.982 297.18,109.982 295.529,108.331 295.529,99.949 297.561,97.917 302.641,97.917 318.897,114.173 318.897,123.444 312.928,129.413 312.928,142.748 310.388,145.288 310.388,153.035 310.261,153.416 v1@310.134,153.416 ; v1@302.133,122.174 302.133,174.752 ; v1(304.292,89.408) 304.292,93.227 324.612,113.547 324.612,137.922 322.052,140.482 320.147,140.482 318.985,139.319 318.985,130.703 316.992,128.71 ; v1@304.673,108.458 303.53,107.315 298.958,107.315 297.434,105.791 297.434,101.854 298.704,100.584 302.26,100.584 305.816,104.14 305.816,104.267 317.373,115.824 317.373,122.174 307.594,131.953 v1(307.594,153.797) ; 305.816,92.202 v1(313.563,92.202) ; v1(309.499,116.586) 309.753,116.84 v1(309.753,120.142) ; v1@309.88,113.411 311.912,115.443 v1(311.912,120.142) ; v1@320.548,153.67 320.929,153.67 v1(320.929,158.369) ; 338.328,41.783 235.204,41.783 235.204,207.772 338.328,207.772 ; 338.328,42.037 338.328,207.645 ; 62.018,64.093 228.007,64.093 228.007,167.217 62.018,167.217 62.018,64.093
  other v1: 284.988,73.66 291.592,74.803 257.175,76.708 288.163,77.216 284.099,86.741 301.752,87.63 291.592,88.138 279.4,88.646 283.845,90.043 292.608,90.17 300.482,104.013 304.8,108.331 272.542,109.093 301.879,110.363 309.626,113.157 301.752,122.301 296.164,122.428 274.828,125.349 316.359,128.776 269.367,140.208 268.986,143.764 268.605,147.32 320.294,153.543 309.753,153.797 321.183,167.132 281.94,174.625 282.702,179.07

## Text inside footprints (layer, text, board x,y; h text height)
GND1: Top Overlay "1" at 90.466,108.924 h1.27 r90; Top Overlay "2" at 87.926,108.416 h1.27 r90; Top Overlay "5" at 90.466,117.56 h1.27 r90; Top Overlay "6" at 87.926,117.56 h1.27 r90
GND1_1: Bottom Overlay "6" at 288.671,67.691 h1.27 r180; Bottom Overlay "5" at 288.671,70.231 h1.27 r180; Bottom Overlay "2" at 279.527,67.691 h1.27 r180; Bottom Overlay "1" at 280.035,70.231 h1.27 r180
TFT1: Top Overlay "35" at 196.257,143.341 h1.27; Top Overlay "36" at 196.257,145.881 h1.27; Top Overlay "2" at 149.013,145.881 h1.27; Top Overlay "1" at 149.013,143.341 h1.27
TFT1_1: Bottom Overlay "1" at 314.452,128.778 h1.27 r270; Bottom Overlay "2" at 316.992,128.778 h1.27 r270; Bottom Overlay "36" at 316.992,176.022 h1.27 r270; Bottom Overlay "35" at 314.452,176.022 h1.27 r270
VCC1: Top Overlay "1" at 82.846,123.148 h1.27 r90; Top Overlay "2" at 80.306,122.64 h1.27 r90; Top Overlay "5" at 82.846,131.784 h1.27 r90; Top Overlay "6" at 80.306,131.784 h1.27 r90
VCC1_1: Bottom Overlay "6" at 302.895,60.071 h1.27 r180; Bottom Overlay "5" at 302.895,62.611 h1.27 r180; Bottom Overlay "2" at 293.751,60.071 h1.27 r180; Bottom Overlay "1" at 294.259,62.611 h1.27 r180
VCC2: Top Overlay "1" at 93.514,135.467 h1.27 r90; Top Overlay "2" at 90.974,134.959 h1.27 r90; Top Overlay "5" at 93.514,144.103 h1.27 r90; Top Overlay "6" at 90.974,144.103 h1.27 r90
VCC2_1: Bottom Overlay "6" at 315.214,70.739 h1.27 r180; Bottom Overlay "5" at 315.214,73.279 h1.27 r180; Bottom Overlay "2" at 306.07,70.739 h1.27 r180; Bottom Overlay "1" at 306.578,73.279 h1.27 r180